# Altium PCB ClassD-DemoBoard-PCB.PcbDoc
Units mm, origin at the board's own origin, x right, y up, seen from the top; angles counter-clockwise.
Board outline 85 x 65 mm, 2 copper layers (Top Layer, Bottom Layer), stack 1.62 mm thick; 53 components, 29 nets, 155 pads, 220 vias.
Unrouted connection lines stored in the file: 2.
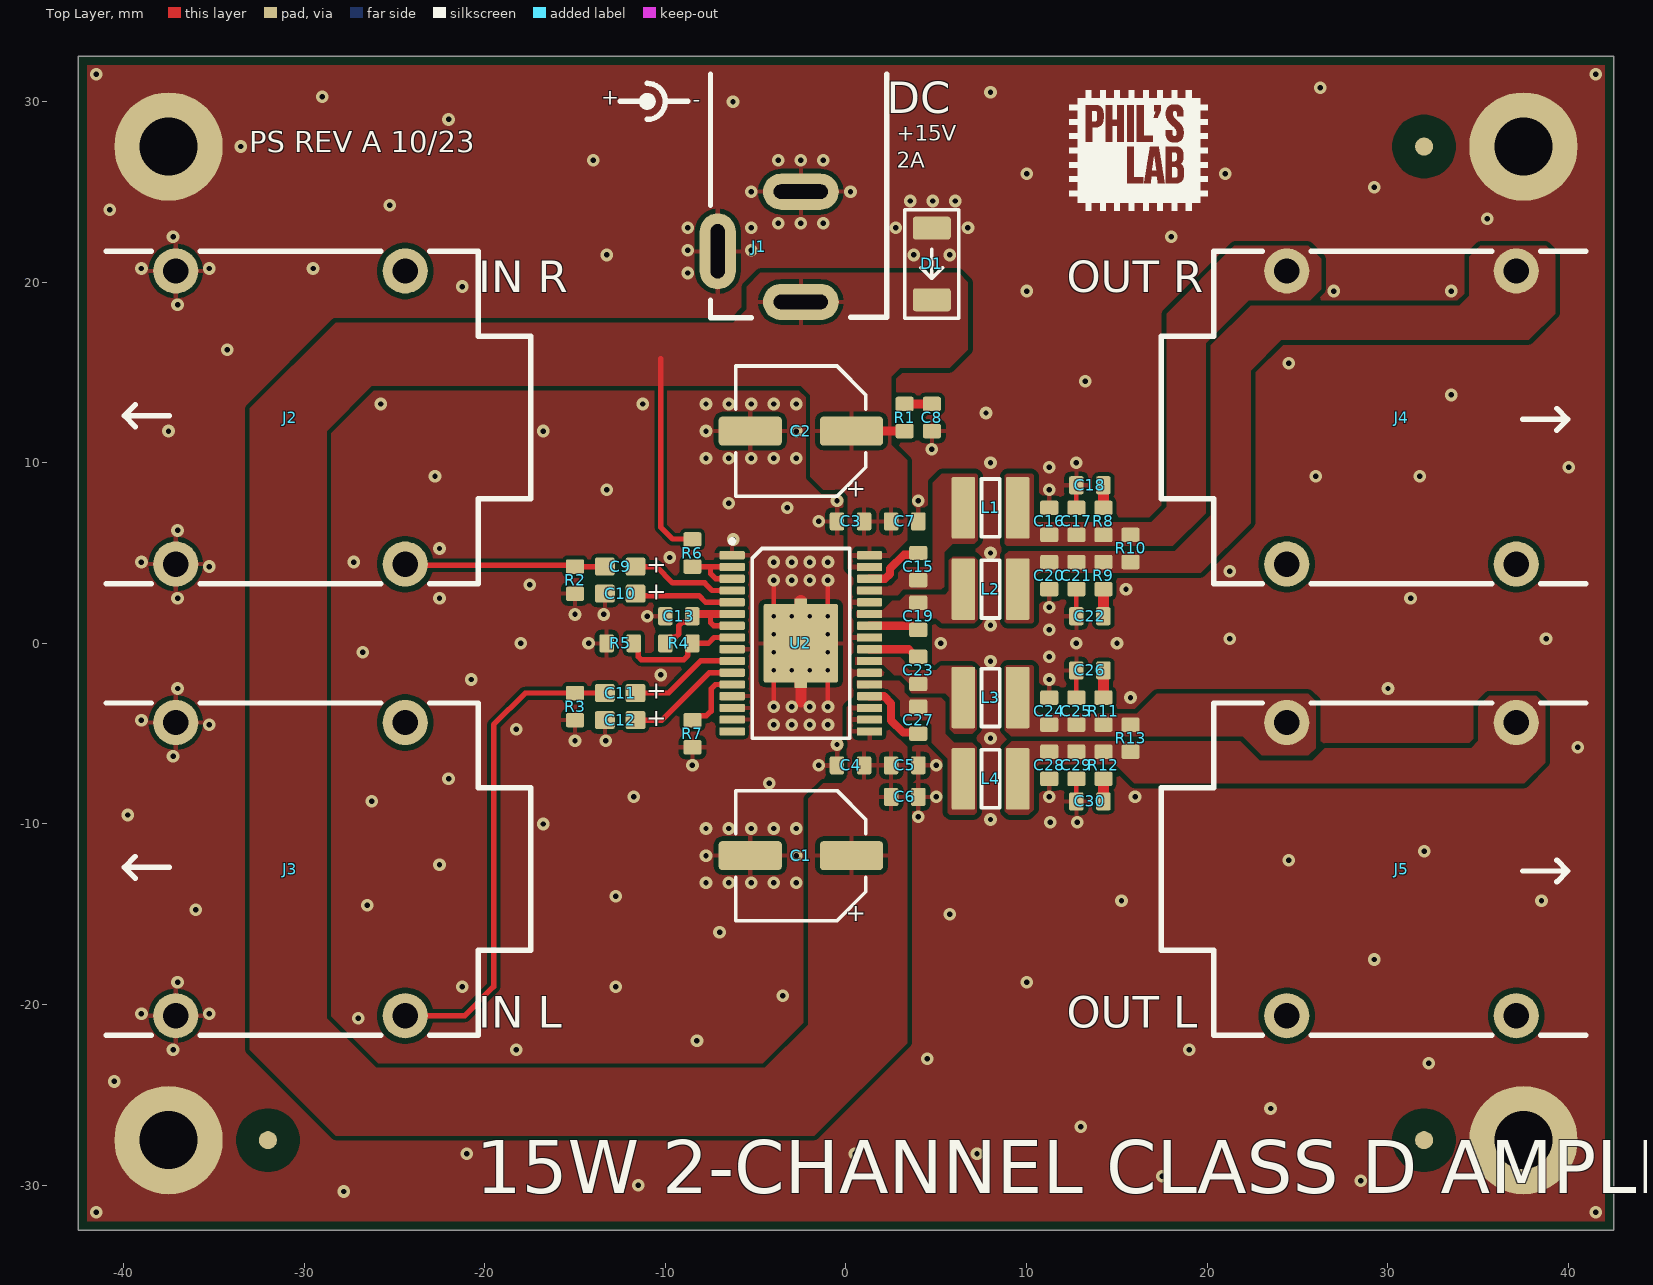
[diagram p0: Top Layer view]
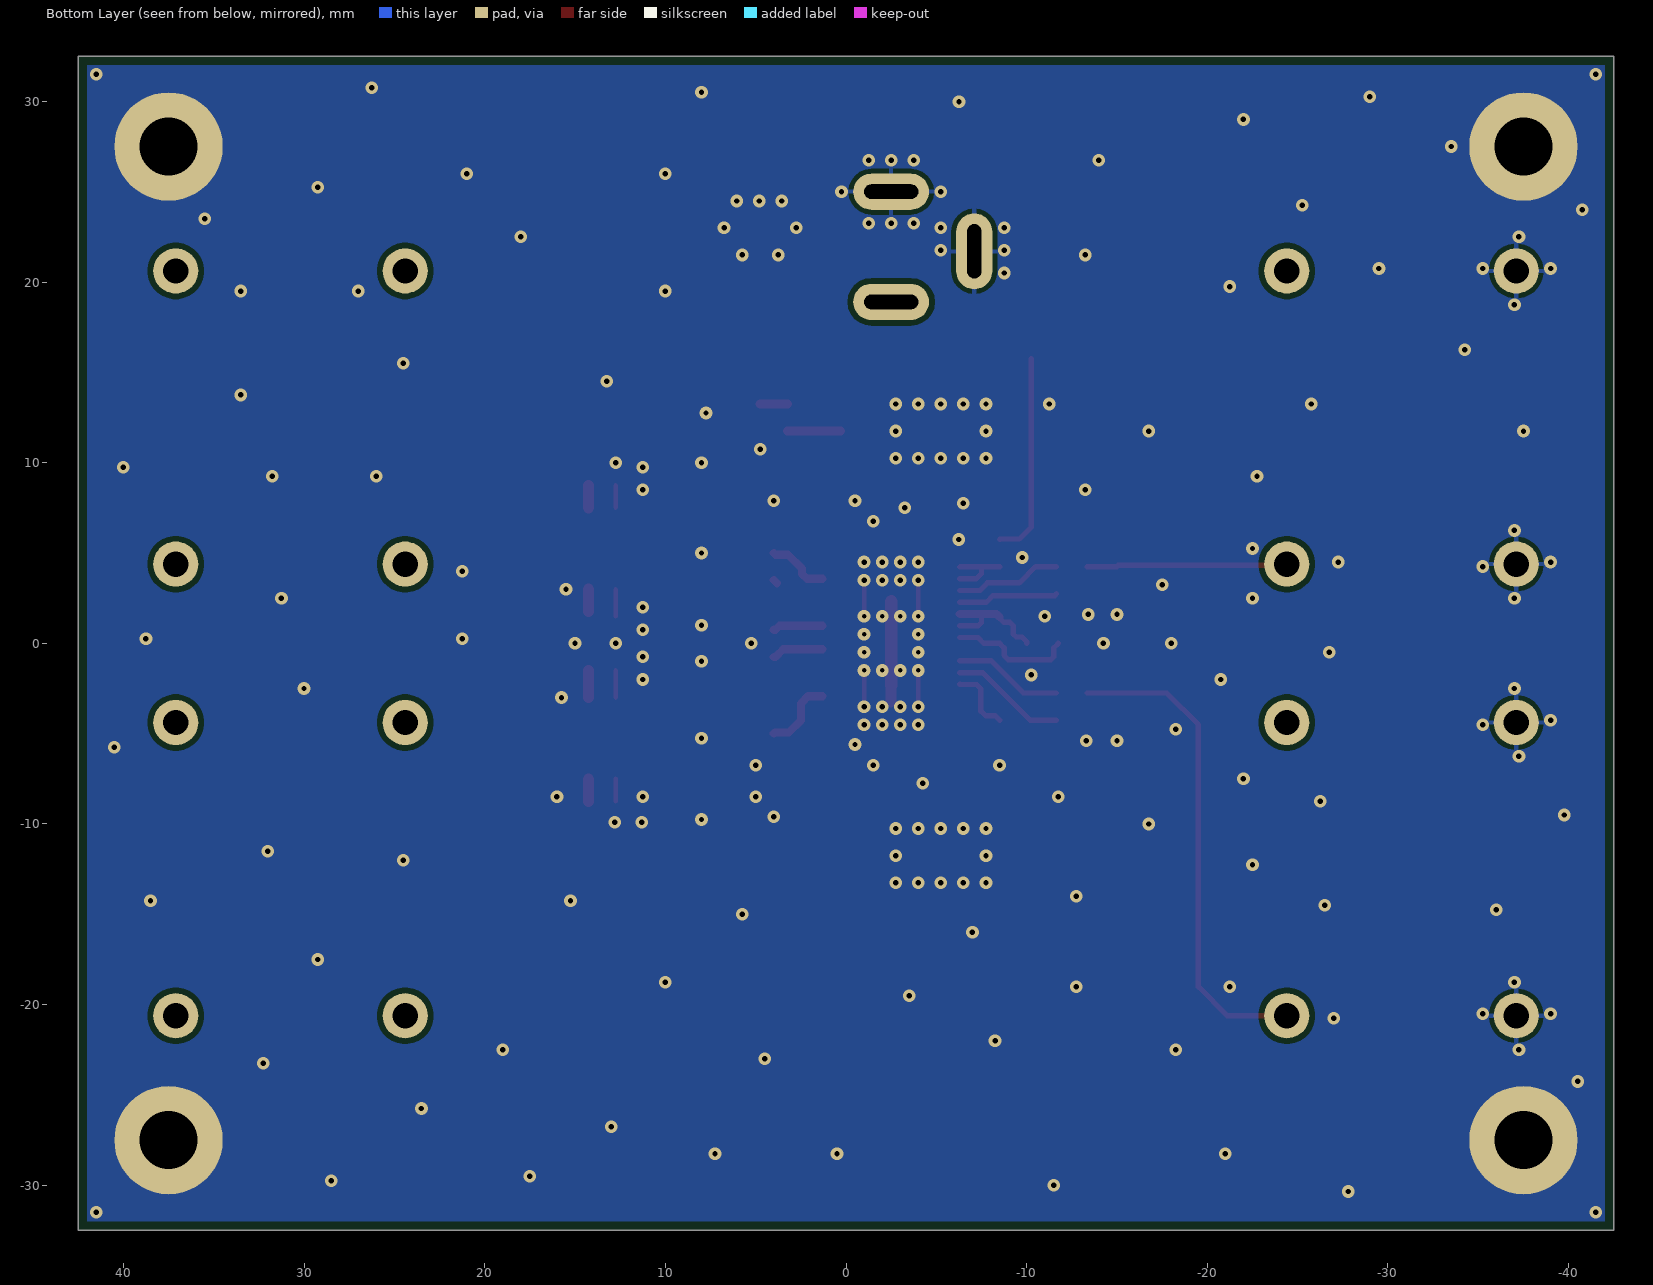
[diagram p1: Bottom Layer view, seen from below]
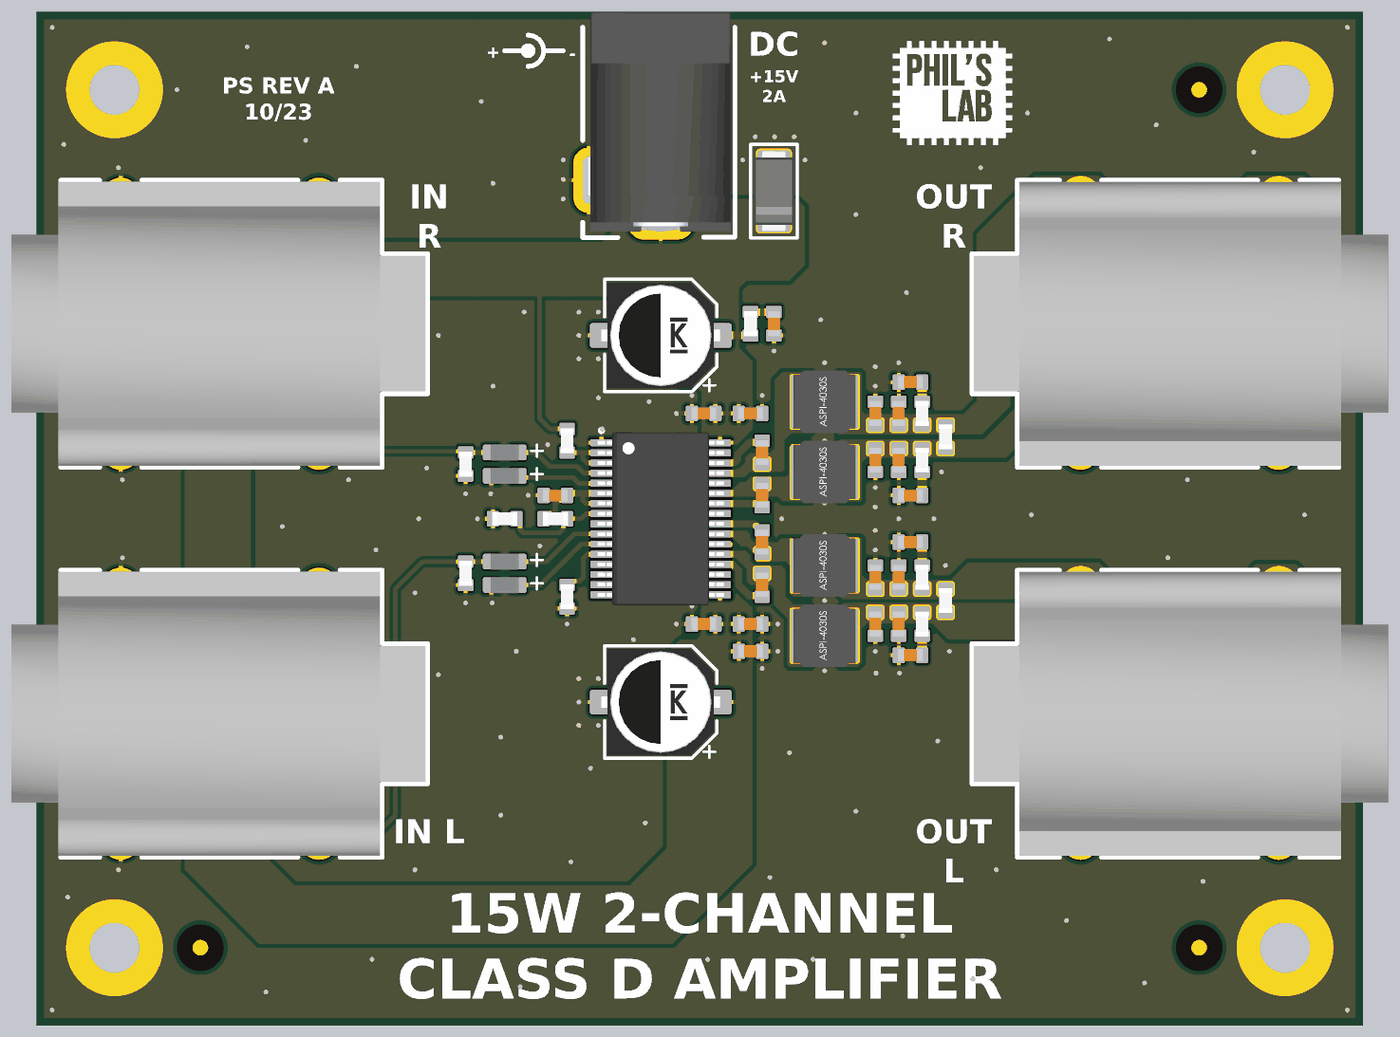
[diagram p2: 3D render of the assembled board from above, using the file's embedded part models]

## Layer stack, top to bottom
Top Solder: solder mask 0.0102, Solder Resist, Dk 3.5
Top Layer: signal copper 0.035
Dielectric 1: dielectric 1.55, FR-4, Dk 4.8
Bottom Layer: signal copper 0.035
Bottom Solder: solder mask 0.0102, Solder Resist, Dk 3.5

## Board outline
-42.5,-32.5 -42.5,32.5 42.5,32.5 42.5,-32.5

## Design rules (kind name [scope] priority, off if disabled: settings)
Clearance [All] p1: gap=0.254 ignorepadtopadclearanceinfootprint=FALSE except(0: Text-Hole; 0.152: Arc-Arc Arc-Track Arc-SMDPad Track-Track Track-SMDPad SMDPad-SMDPad; 0.203: Arc-Fill Arc-Poly Arc-Region Track-Fill Track-Poly Track-Region SMDPad-Fill SMDPad-Poly SMDPad-Region; 0.305: Arc-THPad Arc-Via Track-THPad Track-Via SMDPad-THPad SMDPad-Via THPad-THPad THPad-Via THPad-Fill THPad-Poly THPad-Region Via-Via)
HoleSize [All] p1: absolutevalues=TRUE maxlimit=5 minlimit=0.25 maxpercent=80.000 minpercent=20.000
PolygonConnect [All] p1: thpad.connectstyle=Relief thpad.reliefconductorwidth=0.254 thpad.reliefentries=4 thpad.polygonreliefangle="90 Angle" thpad.airgapwidth=0.254 smdpad.connectstyle=Direct smdpad.reliefconductorwidth=0.254 smdpad.reliefentries=4 smdpad.polygonreliefangle="90 Angle" smdpad.airgapwidth=0.254 via.connectstyle=Direct via.reliefconductorwidth=0.254 via.reliefentries=4 via.polygonreliefangle="90 Angle" via.airgapwidth=0.254
RoutingVias [All] p1: holewidth=0.711 width=1.27 viastyle="Through Hole" minholewidth=0.711 minwidth=1.27 maxholewidth=0.711 maxwidth=1.27
SolderMaskExpansion [All] p1: expansion=0.102 istentingtop=FALSE
Width [All] p1: maxlimit=2 minlimit=0.152 preferedwidth=0.3
29 further rules are at their usual default settings.

## Components (designator, comment, footprint, x,y, rotation, side; value= is the part's Value field where it differs from the comment)
C1 "220u" CAP_AE_SMD_D6MM3_H8MM -2.5,-11.75 r180 top
C2 "220u" CAP_AE_SMD_D6MM3_H8MM -2.5,11.75 r180 top
C3 "220n" CAP_0603 0.25,6.75 r0 top
C4 "220n" CAP_0603 0.25,-6.75 r0 top
C5 "220n" CAP_0603 3.25,-6.75 r180 top
C6 "220n" CAP_0603 3.25,-8.5 r180 top
C7 "220n" CAP_0603 3.25,6.75 r180 top
C8 "220n" CAP_0603 4.75,12.5 r90 top
C9 "1u" CAP_TANT_0603 -12.5,4.25 r180 top
C10 "1u" CAP_TANT_0603 -12.5,2.75 r180 top
C11 "1u" CAP_TANT_0603 -12.5,-2.75 r180 top
C12 "1u" CAP_TANT_0603 -12.5,-4.25 r180 top
C13 "1u" CAP_0603 -9.25,1.5 r180 top
C15 "220n" CAP_0603 4,4.25 r90 top
C16 "1u" CAP_0603 11.25,6.75 r90 top
C17 "1n" CAP_0603 12.75,6.75 r90 top
C18 "10n" CAP_0603 13.5,8.75 r180 top
C19 "220n" CAP_0603 4,1.5 r270 top
C20 "1u" CAP_0603 11.25,3.75 r90 top
C21 "1n" CAP_0603 12.75,3.75 r90 top
C22 "10n" CAP_0603 13.5,1.5 r0 top
C23 "220n" CAP_0603 4,-1.5 r90 top
C24 "1u" CAP_0603 11.25,-3.75 r90 top
C25 "1n" CAP_0603 12.75,-3.75 r90 top
C26 "10n" CAP_0603 13.5,-1.5 r180 top
C27 "220n" CAP_0603 4,-4.25 r270 top
C28 "1u" CAP_0603 11.25,-6.75 r90 top
C29 "1n" CAP_0603 12.75,-6.75 r90 top
C30 "10n" CAP_0603 13.5,-8.75 r0 top
D1 "D_SMA" "DO-214AC-2 (SMA)" 4.75,21 r270 top
J1 "CON-SOCJ-2155" CON-SOCJ-2155 -2.5,25 r180 top
J2 "NMJ4HCD2" NMJ4HCD2 -30.75,12.5 r180 top locked
J3 "NMJ4HCD2" NMJ4HCD2 -30.75,-12.5 r180 top locked
J4 "NMJ4HCD2" NMJ4HCD2 30.75,12.5 r0 top locked
J5 "NMJ4HCD2" NMJ4HCD2 30.75,-12.5 r0 top locked
L1 "10u" ASPI-4030S 8,7.5 r0 top
L2 "10u" ASPI-4030S 8,3 r0 top
L3 "10u" ASPI-4030S 8,-3 r0 top
L4 "10u" ASPI-4030S 8,-7.5 r0 top
R1 "3R3" RES_0603 3.25,12.5 r270 top
R2 "47k" RES_0603 -15,3.5 r90 top
R3 "47k" RES_0603 -15,-3.5 r90 top
R4 "47k" RES_0603 -9.25,0 r0 top
R5 "5k6" RES_0603 -12.5,0 r180 top
R6 "47k" RES_0603 -8.5,5 r270 top
R7 "47k" RES_0603 -8.5,-5 r270 top
R8 "3R3" RES_0603 14.25,6.75 r270 top
R9 "3R3" RES_0603 14.25,3.75 r270 top
R10 "47k" RES_0603 15.75,5.25 r90 top
R11 "3R3" RES_0603 14.25,-3.75 r270 top
R12 "3R3" RES_0603 14.25,-6.75 r270 top
R13 "47k" RES_0603 15.75,-5.25 r90 top
U2 "TPA3130D2DAPR" TSSOP32-DAP -2.5,0 r0 top

## Footprints (in the part's own frame and the unit in brackets; to place one, negate y for a bottom-side part, rotate by r counter-clockwise, add the part's x,y. Pads: shape width x height; smd on the part's side, far side on the other; paste and mask are expansions set on the pad)
ASPI-4030S [mm]
  rrect10% 1.3x3.4 smd: 1(-1.5,0) 2(1.5,0)
  silkscreen extent -0.5,-1.6 0.5,1.6, body extent -2,-2 2,2, height 3.01
CAP_0603 [mm]
  rrect25% 0.8x1 smd: 1(-0.75,0) 2(0.75,0)
  body extent -0.8,-0.4 0.8,0.4, height 0.51
CAP_AE_SMD_D6MM3_H8MM [mm]
  rrect25% 3.5x1.6 smd: 1(-2.8,0) 2(2.8,0)
  silkscreen extent -3.6,-3.6 3.6,3.6, body extent -3.8,-3.4 3.8,3.4, height 8.02
CAP_TANT_0603 [mm]
  rrect25% 1.1x1 smd: A(-0.85,0) K(0.85,0)
  body extent -0.9,-0.53 0.9,0.53, height 0.91
CON-SOCJ-2155 [mm]
  oval 4.2x2 hole 0.8 slot 3 at 0 deg: 1(0,6.1) 2(0,0)
  oval 2x4.2 hole 0.8 slot 3 at 90 deg: 3(4.6,3.3)
  silkscreen extent -4.75,-6.5 5,6.98, body extent -4.5,-7.5 4.75,6.6, height 11.11
"DO-214AC-2 (SMA)" [mm]
  rrect25% 1.27x2.1 smd: A(-1.985,0) K(1.985,0)
  silkscreen extent -3,-1.5 3,1.5, body extent -2.6,-1.3 2.6,1.3, height 2.42
NMJ4HCD2 [mm]
  round 2.5 hole 1.4: S(6.35,8.115) SN(6.35,-8.115) T(-6.35,8.115) TN(-6.35,-8.115)
  silkscreen extent -13.3,-9.2 10.2,9.2, body extent -13.18,-9.1 13.35,9.1, height 15.68
RES_0603 [mm]
  rrect25% 0.8x1 smd: 1(-0.75,0) 2(0.75,0)
  body extent -0.8,-0.43 0.8,0.43, height 0.52
TSSOP32-DAP [mm] "TSOP, 32-Leads, Body 11.00x6.10mm, Pitch 0.65mm, IPC Medium Density"
  rrect25% 1.4x0.45 smd mask+0.14: 1(-3.8,4.875) 2(-3.8,4.225) 3(-3.8,3.575) 4(-3.8,2.925) 5(-3.8,2.275) 6(-3.8,1.625) 7(-3.8,0.975) 8(-3.8,0.325) 9(-3.8,-0.325) 10(-3.8,-0.975) 11(-3.8,-1.625) 12(-3.8,-2.275) 13(-3.8,-2.925) 14(-3.8,-3.575) 15(-3.8,-4.225) 16(-3.8,-4.875) 17(3.8,-4.875) 18(3.8,-4.225) 19(3.8,-3.575) 20(3.8,-2.925) 21(3.8,-2.275) 22(3.8,-1.625) 23(3.8,-0.975) 24(3.8,-0.325) 25(3.8,0.325) 26(3.8,0.975) 27(3.8,1.625) 28(3.8,2.275) 29(3.8,2.925) 30(3.8,3.575) 31(3.8,4.225) 32(3.8,4.875)
  rrect5% 0.7x0.3 smd mask+0.14: 33(0,-2.325) 33(0,2.325)
  rrect5% 4.11x4.36 smd mask+0.14: 33(0,0)
  silkscreen extent -3.9,-5.25 2.7,5.75, body extent -4.05,-5.55 4.05,5.55, height 1.15

## Part data
C1 C2: library part CAP_ALEL_D6MM3_H8MM, "Capacitor SMD Aluminium Electrolytic 6.3mm Diameter 8mm Height", LCSC=C340768, Manufacturer=Nichicon, Manufacturer Part Number=UCM1E221MCL1GS, Distributor Link=https://www.lcsc.com/product-detail/Aluminum-Electrolytic-Capacitors-SMD_Nichicon-UCM1E221MCL1GS_C340768.html
C3 C4 C5 C6 C7 C8 C15 C19 C23 C27: library part CAP_0603, "Capacitor SMD 0603", LCSC=C21120, Manufacturer=Samsung, Manufacturer Part Number=CL10B224KA8NNNC, Rating=25V, Distributor Link=https://www.lcsc.com/product-detail/Multilayer-Ceramic-Capacitors-MLCC-SMD-SMT_Samsung-Electro-Mechanics-CL10B224KA8NNNC_C21120.html
C9 C10 C11 C12: library part CAP_TANT_0603, "Capacitor SMD Tantalum 0603", LCSC=C1952840, Manufacturer=Vishay, Manufacturer Part Number=298D105X0025M2T, Distributor Link=https://www.lcsc.com/product-detail/Tantalum-Capacitors_Vishay-Intertech-298D105X0025M2T_C1952840.html
C13 C16 C20 C24 C28: library part CAP_0603, "Capacitor SMD 0603", LCSC=C15849, Manufacturer=Samsung, Manufacturer Part Number=CL10A105KB8NNNC, Rating=50V, Distributor Link=https://www.lcsc.com/product-detail/Multilayer-Ceramic-Capacitors-MLCC-SMD-SMT_Samsung-Electro-Mechanics-CL10A105KB8NNNC_C15849.html
C17 C21 C25 C29: library part CAP_0603, "Capacitor SMD 0603", LCSC=C1588, Manufacturer=Samsung, Manufacturer Part Number=CL10B102KB8NNNC, Rating=50V, Distributor Link=https://www.lcsc.com/product-detail/Multilayer-Ceramic-Capacitors-MLCC-SMD-SMT_Samsung-Electro-Mechanics-CL10B102KB8NNNC_C1588.html
C18 C22 C26 C30: library part CAP_0603, "Capacitor SMD 0603", LCSC=C57112, Manufacturer=FH, Manufacturer Part Number=0603B103K500NT, Rating=50V, Distributor Link=https://www.lcsc.com/product-detail/Multilayer-Ceramic-Capacitors-MLCC-SMD-SMT_FH-Guangdong-Fenghua-Advanced-Tech-0603B103K500NT_C57112.html
D1: "Diode SMD SMA (DO-214AA)"
J1: "DC Barrell Jack 2.1mm 30V 2.5A THT", Manufacturer=Gravitech, Distributor Link=https://www.mouser.de/ProductDetail/Gravitech/CON-SOCJ-2155?qs=fkzBJ5HM%252BdCcpvFQyQZHtA%3D%3D&_gl=1*ni0d5y*_ga*MjU5MDE1MzgyLjE2NTQ4NDcxMjU.*_ga_15W4STQT4T*MTY5Njc2NjEwNi4yNTkuMS4xNjk2NzY2MTE4LjQ4LjAuMA..*_ga_1KQLCYKRX3*MTY5NTYzNTI2NS4xODkuMS4xNjk1NjM1MjcxLjU0LjAuMA.., Manufacturer Part Number=CON-SOCJ-2155
J2 J3 J4 J5: "1/4\" Mono Jack, TS Switched", Manufacturer=Neutrik, Distributor Link=https://www.mouser.de/ProductDetail/Neutrik/NMJ4HCD2?qs=SzdD80gJ2cAr9Xh3wJi7nw%3D%3D, Manufacturer Part Number=NMJ4HCD2
L1 L2 L3 L4: library part ASPI-4030S, "Power Inductor SMD ASPI-4030S Series", LCSC=C2050513, Manufacturer=ABRACON, Manufacturer Part Number=ASPI-4030S-100M-T, Distributor Link=https://www.lcsc.com/product-detail/Power-Inductors_Abracon-LLC-ASPI-4030S-100M-T_C2050513.html
R1 R8 R9 R11 R12: library part RES_0603, "Resistor SMD 0603", LCSC=C137627, Manufacturer=YAGEO, Manufacturer Part Number=RC0603JR-073R3L, Distributor Link=https://www.lcsc.com/product-detail/Chip-Resistor-Surface-Mount_YAGEO-RC0603JR-073R3L_C137627.html
R2 R3 R4 R6 R7 R10 R13: library part RES_0603, "Resistor SMD 0603", LCSC=C25819, Manufacturer=UNI-ROYAL, Manufacturer Part Number=0603WAF4702T5E, Distributor Link=https://www.lcsc.com/product-detail/Chip-Resistor-Surface-Mount_UNI-ROYAL-Uniroyal-Elec-0603WAF4702T5E_C25819.html
R5: library part RES_0603, "Resistor SMD 0603", LCSC=C23189, Manufacturer=UNI-ROYAL, Manufacturer Part Number=0603WAF5601T5E, Distributor Link=https://www.lcsc.com/product-detail/Chip-Resistor-Surface-Mount_UNI-ROYAL-Uniroyal-Elec-0603WAF5601T5E_C23189.html
U2: "2x15W Filter-Free Class-D Stereo Amplifier With AM Avoidance", LCSC=C95206, Manufacturer="Texas Instruments", Distributor Link=https://www.lcsc.com/product-detail/Audio-Power-OpAmps_Texas-Instruments-TPA3130D2DAPR_C95206.html, Manufacturer Part Number=TPA3130D2DAPR

## Free pads (board coordinates)
  round 1 smd paste-1 mask+1: FM(-32,-27.5) FM(32,-27.5) FM(32,27.5)
  round 6 hole 3.2: MH(-37.5,-27.5) MH(-37.5,27.5) MH(37.5,-27.5) MH(37.5,27.5)

## Via types
v1: diameter 0.7, hole 0.3, Top Layer to Bottom Layer, tented both sides, 208 vias
v2: diameter 0.7, hole 0.25, Top Layer to Bottom Layer, tented both sides, 12 vias

## Nets (pads, with @x,y where several pads share a name; then routed paths per layer and width w, separated by ;. In a path a pad name is that pad's centre, name@x,y a point inside that pad or via, vN(x,y) a via of type N, cw(c..) or ccw(c..) an arc to the next point about the centre after c; other vN are vias at no path point)
15V_RC: C8.2 R1.1 | length 1.5
  Top Layer w0.5: R1.1 C8.2
+15V: C1.1 C2.1 C3.2 C4.2 C5.2 C6.2 C7.2 D1.K J1.1 R1.2 R6.1 U2.17 U2.18 U2.19 U2.31 U2.32 | length 14.3
  Top Layer w0.3: -10.25,15.75 -10.25,6.425 -9.599,5.774 -8.524,5.774 R6.1
  Top Layer w0.5: C2.1 R1.2
FAULTZ_SDZ: R6.2 U2.2 U2.3 | length 3.9
  Top Layer w0.3: R6.2 -8.487,4.237 -7.4,4.237 ; U2.3 -6.306,3.581 -7.223,3.581 -7.5,3.858 -7.5,4.137 -7.4,4.237 ; U2.2 -6.312,4.237 -7.4,4.237
GAIN_SLV: R4.2 R5.1 U2.8 | length 6.9
  Top Layer w0.3: R5.1 -11.5,-0.25 -11.5,-0.735 -11.324,-0.911 -8.992,-0.911 -8.75,-0.669 -8.75,-0.25 R4.2 -7.626,0 -7.301,0.325 U2.8
GND: C1.2 C2.2 C3.1 C4.1 C5.1 C6.1 C7.1 C8.1 C10.K C12.K C13.2 C16.2 C17.2 C18.2 C20.1 C21.1 C22.1 C24.2 C25.2 C26.2 C28.1 C29.1 C30.1 D1.A J1.2 J1.3 J2.S J2.SN J2.TN J3.S J3.SN J3.TN pad.MH R2.1 R3.1 R5.2 R7.2 U2.1 U2.9 U2.13 U2.14 U2.15 U2.22 U2.25 U2.28 U2.33 | length 19.1
  Top Layer w0.254: v1(-4,-3.5) v2(-4,-1.5) ; v2(-4,1.5) v1(-4,3.5) ; v1(-1,-3.5) v2(-1,-1.5) ; v2(-1,1.5) v1(-1,3.5) ; C30.1 C29.1 ; C25.2 C26.2 ; C22.1 C21.1 ; C17.2 C18.2
  Top Layer w0.6: -2.5,-3.25 U2.33@-2.5,-2.325
  Top Layer w0.7: U2.33@-2.5,-2.325 -2.5,0 U2.33@-2.5,2.325
  other v1: -41.5,-31.5 41.5,-31.5 -27.793,-30.34 -11.5,-30 28.5,-29.75 17.5,-29.5 -21,-28.25 0.5,-28.25 7.25,-28.25 13,-26.75 23.5,-25.75 -40.5,-24.25 32.25,-23.25 4.5,-23 -37.25,-22.5 -18.25,-22.5 19,-22.5 -8.25,-22 -27,-20.75 -39,-20.5 -35.25,-20.5 -3.5,-19.5 -21.25,-19 -12.75,-19 -37,-18.75 10,-18.75 29.25,-17.5 -7,-16 5.75,-15 -36,-14.75 -26.5,-14.5 15.25,-14.25 38.5,-14.25 -12.75,-14 -7.75,-13.25 -6.5,-13.25 -5.25,-13.25 -4,-13.25 -2.75,-13.25 -22.5,-12.25 24.5,-12 -7.75,-11.75 -2.75,-11.75 32,-11.5 -7.75,-10.25 -6.5,-10.25 -5.25,-10.25 -4,-10.25 -2.75,-10.25 -16.75,-10 11.3,-9.9 12.8,-9.9 8,-9.75 4,-9.6 -39.75,-9.5 -26.25,-8.75 -11.75,-8.5 5,-8.5 11.25,-8.5 16,-8.5 -4.25,-7.75 -22,-7.5 -8.5,-6.75 -1.5,-6.75 5,-6.75 -37.25,-6.25 40.5,-5.75 -0.5,-5.6 -15,-5.4 -13.3,-5.4 8,-5.25 -18.25,-4.75 -35.25,-4.5 -4,-4.5 -3,-4.5 -2,-4.5 -1,-4.5 -39,-4.25 -3,-3.5 -2,-3.5 15.75,-3 -37,-2.5 30,-2.5 -20.75,-2 11.25,-2 -10.25,-1.75 8,-1 11.25,-0.75 -26.75,-0.5 -18,0 -14.25,0 5.25,0 12.75,0 15,0 21.25,0.25 38.75,0.25 11.25,0.75 8,1 -11,1.5 -15,1.6 -13.4,1.6 11.25,2 -37,2.5 -22.5,2.5 31.25,2.5 15.5,3 -17.5,3.25 -3,3.5 -2,3.5 21.25,4 -35.25,4.25 -39,4.5 -27.25,4.5 -4,4.5 -3,4.5 -2,4.5 -1,4.5 -9.75,4.75 8,5 -22.5,5.25 -6.25,5.75 -37,6.25 -1.5,6.75 -3.25,7.5 -6.5,7.75 -0.5,7.9 4,7.9 -13.25,8.5 11.25,8.5 -22.75,9.25 26,9.25 31.75,9.25 11.25,9.75 40,9.75 8,10 12.75,10 -7.75,10.25 -6.5,10.25 -5.25,10.25 -4,10.25 -2.75,10.25 4.75,10.75 -37.5,11.75 -16.75,11.75 -7.75,11.75 -2.75,11.75 7.75,12.75 -25.75,13.25 -11.25,13.25 -7.75,13.25 -6.5,13.25 -5.25,13.25 -4,13.25 -2.75,13.25 33.5,13.75 13.25,14.5 24.5,15.5 -34.25,16.25 -37,18.75 10,19.5 27,19.5 33.5,19.5 -21.25,19.75 -8.75,20.5 -39,20.75 -35.25,20.75 -29.5,20.75 -13.25,21.5 3.75,21.5 5.75,21.5 -8.75,21.75 -5.25,21.75 -37.25,22.5 18,22.5 -8.75,23 -5.25,23 2.75,23 6.75,23 -3.75,23.25 -2.5,23.25 -1.25,23.25 35.5,23.5 -40.75,24 -25.25,24.25 3.55,24.485 4.8,24.485 6.05,24.485 -5.25,25 0.25,25 29.25,25.25 10,26 21,26 -14,26.75 -3.75,26.75 -2.5,26.75 -1.25,26.75 -33.5,27.5 -22,29 -6.256,29.973 -29,30.25 8,30.5 26.25,30.75 -41.5,31.5 41.5,31.5
  other v2: -3,-1.5 -2,-1.5 -4,-0.5 -1,-0.5 -4,0.5 -1,0.5 -3,1.5 -2,1.5
GVDD_PLIM: C13.1 R4.1 U2.6 U2.7 | length 6.5
  Top Layer w0.3: R4.1 -10,0.1 -9.75,0.35 -9.426,0.35 -9.25,0.526 -9.25,0.981 -9.074,1.157 -8.75,1.157 -8.5,1.407 -8.5,1.45 C13.1 ; -7.5,1.625 -7.5,1.151 -7.324,0.975 U2.7
  Top Layer w0.45: C13.1@-8.5,1.45 -8.325,1.625 -7.5,1.625 U2.6
IN.L: C11.K J3.T R3.2 | length 26.9
  Top Layer w0.3: J3.T -21.115,-20.615 -19.5,-19 -19.5,-4.5 -17.75,-2.75 R3.2 C11.K
IN.L_AC: C11.A U2.10 | length 6.1
  Top Layer w0.3: C11.A -9.821,-2.75 -8.046,-0.975 U2.10
IN.L_AC_N: C12.A U2.11 | length 6.4
  Top Layer w0.3: C12.A -10.186,-4.25 -7.561,-1.625 U2.11
IN.R: C9.K J2.T R2.2 | length 11.1
  Top Layer w0.3: J2.T -24.332,4.317 -15.067,4.317 R2.2 C9.K
IN.R_AC: C9.A U2.4 | length 5.9
  Top Layer w0.3: C9.A -10.5,4.25 -9.595,3.345 -7.83,3.345 -7.41,2.925 U2.4
IN.R_AC_N: C10.A U2.5 | length 5.5
  Top Layer w0.3: C10.A -11.545,2.645 -8.148,2.645 -7.778,2.275 U2.5
MUTE: R7.1 U2.12 | length 3.7
  Top Layer w0.3: R7.1 -8.257,-4.007 -7.725,-4.007 -7.466,-3.748 -7.466,-2.516 -7.227,-2.277 -6.302,-2.277 U2.12
OUT.L_BS_N: C27.2 U2.20 | length 4.1
  Top Layer w0.45: U2.20 2.103,-2.925 2.5,-3.322 2.5,-4.27 3.167,-4.937 3.937,-4.937 C27.2
OUT.L_BS_P: C23.2 U2.24 | length 2.9
  Top Layer w0.45: U2.24 3.475,-0.325 3.9,-0.75 C23.2
OUT.L_L_N: C27.1 L4.1 U2.21
OUT.L_L_P: C23.1 L3.1 U2.23
OUT.L_N: C28.2 C29.2 J5.S L4.2 R12.1 R13.1
OUT.L_N_RC: C30.2 R12.2 | length 1.2
  Top Layer w0.6: C30.2 R12.2
OUT.L_P: C24.1 C25.1 J5.T L3.2 R11.2 R13.2
OUT.L_P_RC: C26.1 R11.1 | length 1.5
  Top Layer w0.6: R11.1 C26.1
OUT.R_BS_N: C19.2 U2.26 | length 2.8
  Top Layer w0.45: U2.26 3.675,0.975 3.9,0.75 C19.2
OUT.R_BS_P: C15.2 U2.30 | length 3.5
  Top Layer w0.45: U2.30 2.168,3.575 2.432,3.839 2.432,4.134 3.201,4.903 3.903,4.903 C15.2
OUT.R_L_N: C19.1 L2.1 U2.27
OUT.R_L_P: C15.1 L1.1 U2.29 | length 0.2
  Top Layer w0.45: C15.1@3.825,3.325 C15.1
OUT.R_N: C20.2 C21.2 J4.S L2.2 R9.1 R10.1
OUT.R_N_RC: C22.2 R9.2 | length 1.3
  Top Layer w0.6: C22.2@14.25,1.75 R9.2
OUT.R_P: C16.1 C17.1 J4.T L1.2 R8.2 R10.2
OUT.R_P_RC: C18.1 R8.1 | length 1.3
  Top Layer w0.6: R8.1 C18.1
pads on no net: J4.SN J4.TN J5.SN J5.TN U2.16

## Polygon pours and split planes (outlines as drawn)
GND on Bottom Layer "GND_BOT" (solid, pour order 10): -42,-32 -42,32 42,32 42,-32
GND on Top Layer "GND_TOP" (solid, pour order 9): -42,-32 -42,32 42,32 42,-32
+15V on Top Layer "15V_TOP" (solid, pour order 0): -26.25,14.25 -28.75,11.75 -28.75,-20.75 -26,-23.5 -4.5,-23.5 -2.1,-21.1 -2.1,-8.6 -1.25,-7.75 -0.25,-7.75 0.052,-7.448 0.052,-3.533 0.272,-3.313 2,-3.313 2,-4.333 3.377,-5.71 3.377,-22.123 -1.75,-27.25 -28.25,-27.25 -33,-22.5 -33,13 -28.25,17.75 -6.25,17.75 -5.5,18.5 -5.5,19.75 -4.75,20.5 6.25,20.5 6.75,20 6.75,16.25 5.75,15.25 3,15.25 2.5,14.75 2.5,11 3.377,10.123 3.377,5.708 2,4.331 2,4 0.25,4 0.108,4.142 0.108,8.142 -0.25,8.5 -1.25,8.5 -1.978,9.228 -1.978,13.728 -2.5,14.25
OUT.L_N on Top Layer "OUT.L_N_L01_P008" (solid, pour order 8): 25.8,-6.5 26.5,-5.8 34.6,-5.8 35,-5.4 35,-3.5 35.6,-2.9 38.2,-2.9 38.7,-3.4 38.7,-6.6 37.55,-7.75 15.95,-7.75 14.9,-6.7 10.7,-6.7 10.4,-7 10.4,-9.2 10.1,-9.5 9,-9.5 8.8,-9.3 8.8,-5.8 9.2,-5.4 21.8,-5.4 22.9,-6.5
OUT.L_P on Top Layer "OUT.L_P_L01_P007" (solid, pour order 7): 8.9,-1.2 10.3,-1.2 10.4,-1.3 10.4,-3.6 10.7,-3.9 16.1,-3.9 17.2,-2.8 25.6,-2.8 26,-3.2 26,-5.8 25.6,-6.2 23,-6.2 21.953,-5.153 9.153,-5.153 8.8,-4.8 8.8,-1.3
OUT.L_L_N on Top Layer "OUT.L_L_N_L01_P006" (solid, pour order 6): 2.945,-2.06 3.231,-2.346 3.231,-2.698 3.533,-3 5.25,-3 5.5,-3.25 5.5,-5 6,-5.5 7,-5.5 7.25,-5.75 7.25,-9.35 7.1,-9.5 5.75,-9.5 5.625,-9.375 5.625,-6.375 4.75,-5.5 4.75,-4.5 4.5,-4.25 3.25,-4.25 3,-4 3,-3.189 2.311,-2.5 0.592,-2.5 0.592,-2.06
OUT.L_L_P on Top Layer "OUT.L_L_P_L01_P005" (solid, pour order 5): 2.073,-1.19 2.663,-1.779 3.029,-1.779 3.5,-2.25 3.5,-2.6 3.65,-2.75 5.5,-2.75 5.75,-3 5.75,-4.75 6,-5 7,-5 7.25,-4.75 7.25,-1.5 7,-1.25 5.25,-1.25 5,-1.5 3.5,-1.5 3.25,-1.25 3.25,-1 3,-0.75 0.5,-0.75 0.5,-1.19
OUT.R_N on Top Layer "NONET_L-01_P-001" (solid, pour order 3): 8.8,1.2 8.9,1.1 10.3,1.1 10.4,1.2 10.4,3.6 10.7,3.9 19.65,3.9 22.4,6.65 22.4,15.1 24.1,16.8 37.8,16.8 39.25,18.25 39.25,21.5 38.75,22 35.1,22 34.5,21.4 34.5,19.25 33.95,18.7 22.4,18.7 20.2,16.5 20.2,7.1 18.2,5.1 9,5.1 8.8,4.9
OUT.R_P on Top Layer "NONET_L-01_P-001" (solid, pour order 4): 8.8,9.3 8.9,9.4 10.3,9.4 10.4,9.3 10.4,6.9 10.6,6.7 16.9,6.7 17.75,7.55 17.75,18.25 21.5,22 25.6,22 26.3,21.3 26.3,19.6 25.7,19 22.3,19 19.9,16.6 19.9,7.2 18.1,5.4 8.9,5.4 8.8,5.5
OUT.R_L_P on Top Layer "NONET_L-01_P-001" (solid, pour order 2): 0.587,3.2 2.5,3.2 2.9,3.6 2.9,3.9 3.2,4.2 4.5,4.2 4.8,4.5 4.8,8.9 5.3,9.4 7.2,9.4 7.3,9.3 7.3,5.7 7.1,5.5 5.9,5.5 5.435,5.035 5.435,3.135 5.281,2.981 3.181,2.981 2.868,2.668 0.587,2.668
OUT.R_L_N on Top Layer "NONET_L-01_P-001" (solid, pour order 1): 2.041,1.844 2.566,2.369 2.969,2.369 3.3,2.7 5.5,2.7 5.7,2.9 5.7,4.6 5.9,4.8 7.1,4.8 7.3,4.6 7.3,1.3 7.1,1.1 5.3,1.1 5,1.4 0.56,1.4 0.56,1.844

## Other copper
Top Layer:
  pour cut-out: 32,29.25 cw(c32,27.5) 33.75,27.5 cw(c32,27.5) 32,25.75 cw(c32,27.5) 30.25,27.5 cw(c32,27.5)
  pour cut-out: 32,-25.75 cw(c32,-27.5) 33.75,-27.5 cw(c32,-27.5) 32,-29.25 cw(c32,-27.5) 30.25,-27.5 cw(c32,-27.5)
  pour cut-out: -32,-25.75 cw(c-32,-27.5) -30.25,-27.5 cw(c-32,-27.5) -32,-29.25 cw(c-32,-27.5) -33.75,-27.5 cw(c-32,-27.5)
  pour cut-out: 3.245,-1.101 3.245,1.147 4.75,1.147 4.75,-1.101
  pour cut-out: 3,11.252 3,13.5 4.25,13.5 4.25,11.252
  pour cut-out: 13.25,-8.498 13.25,-7 14.5,-7 14.5,-8.498
  pour cut-out: 14.498,7 12.25,7 12.25,8.25 14.498,8.25
  pour cut-out: 13.002,-3.544 13.002,-1.296 14.252,-1.296 14.252,-3.544
  pour cut-out: 13,1.252 13,3.5 14.25,3.5 14.25,1.252
  pour cut-out: -14.75,-2.75 -12,-2.75 -12,-4 -14.75,-4
  pour cut-out: -14.75,4.5 -12,4.5 -12,3.25 -14.75,3.25

## Silkscreen, mask and mechanical layers (free items; w line width, h text height)
Top Overlay:
  drawing of 9 lines, arcs and shapes, not listed
  text "+" at -13.539,29.498 h1.5
  text "-" at -8.471,29.402 h1.5
  text "DC" at 2.268,28.768 h3
  text "PS REV A 10/23" at -33.029,26.786 h2
  text "+15V / 2A" at 2.823,26.02 h1.5
  text "IN R" at -20.35,18.85 h3
  text "OUT R" at 12.225,18.85 h3
  text "IN L" at -20.35,-21.85 h3
  text "OUT L" at 12.225,-21.85 h3
  text "15W 2-CHANNEL CLASS D AMPLIFIER" at -20.5,-31.404 h5
Mechanical 13:
  the board outline again, w0.2

## Text inside footprints (layer, text, board x,y; h text height)
C1: Mechanical 13 "+" at 1.133,-14.55 h1 r180; Top Overlay "+" at 1.133,-14.55 h1 r180
C2: Mechanical 13 "+" at 1.133,8.95 h1 r180; Top Overlay "+" at 1.133,8.95 h1 r180
C9: Mechanical 13 "+" at -11.167,3.25 h1 r180; Top Overlay "+" at -9.917,4.75 h1 r180
C10: Mechanical 13 "+" at -11.167,1.75 h1 r180; Top Overlay "+" at -9.917,3.25 h1 r180
C11: Mechanical 13 "+" at -11.167,-3.75 h1 r180; Top Overlay "+" at -9.917,-2.25 h1 r180
C12: Mechanical 13 "+" at -11.167,-5.25 h1 r180; Top Overlay "+" at -9.917,-3.75 h1 r180